# Altium PCB PCB1.PcbDoc
Units mil, origin at the board's own origin, x right, y up, seen from the top; angles counter-clockwise.
Board outline 2645 x 1530 mil, 4 copper layers (Top Layer, Ground, Power, Bottom Layer), stack 23.756 mil thick; 53 components, 33 nets, 159 pads, 54 vias.
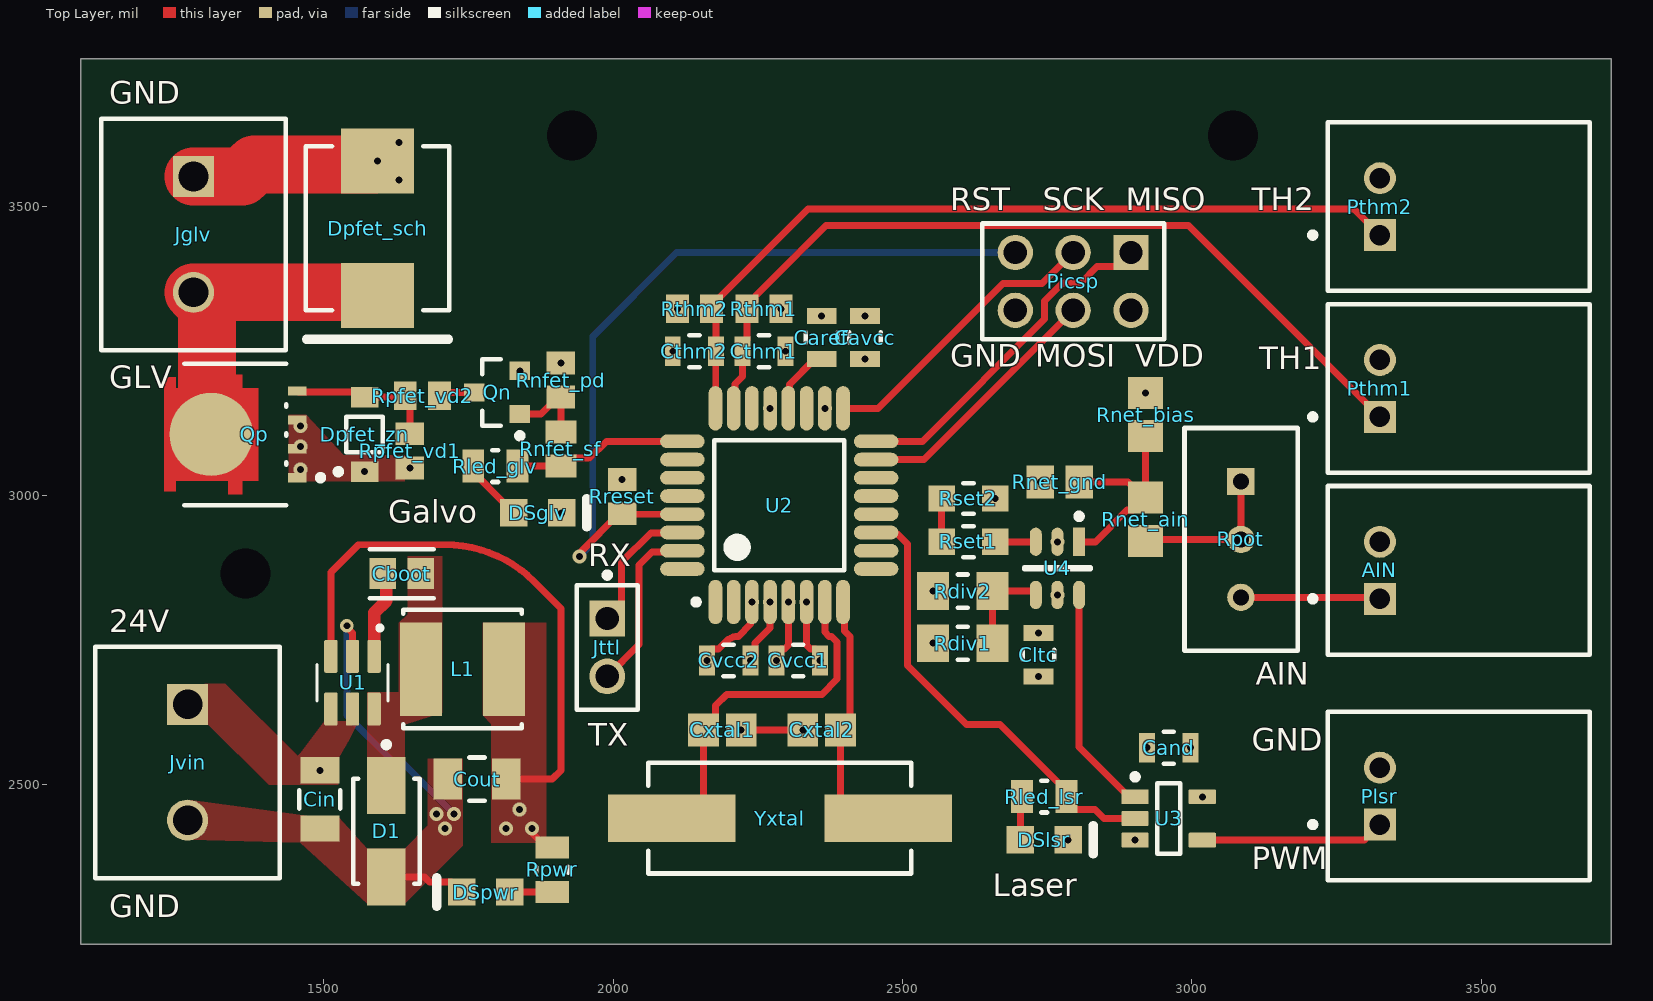
[diagram p0: Top Layer view]
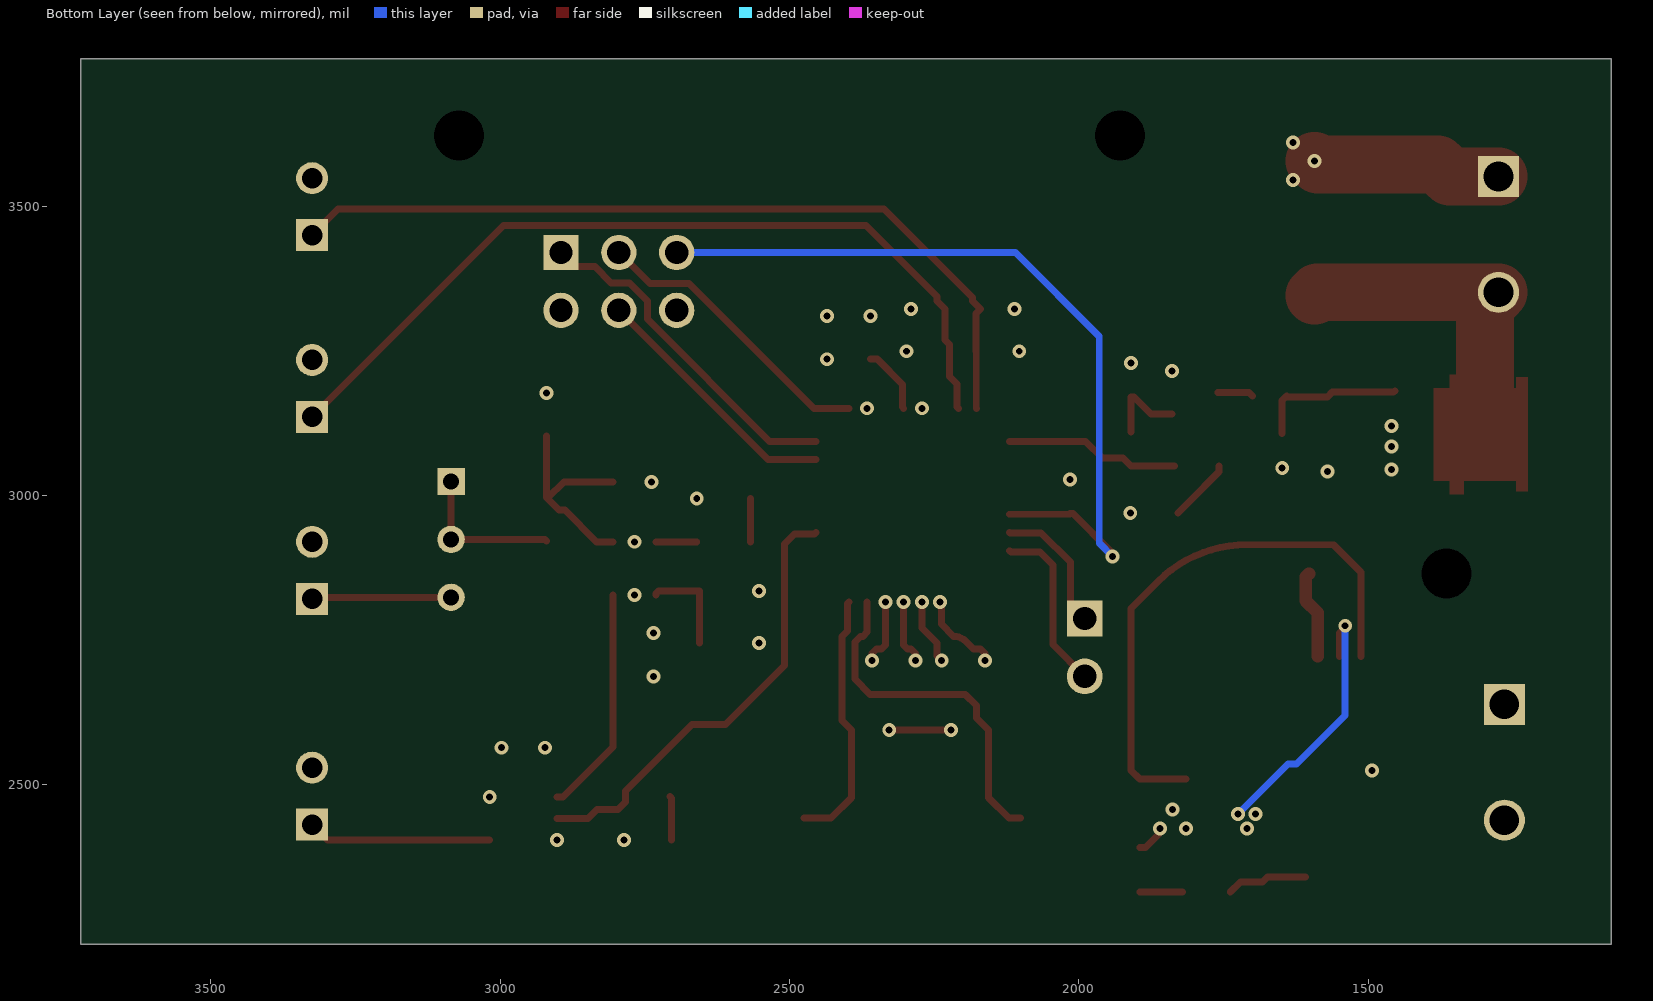
[diagram p1: Bottom Layer view, seen from below]
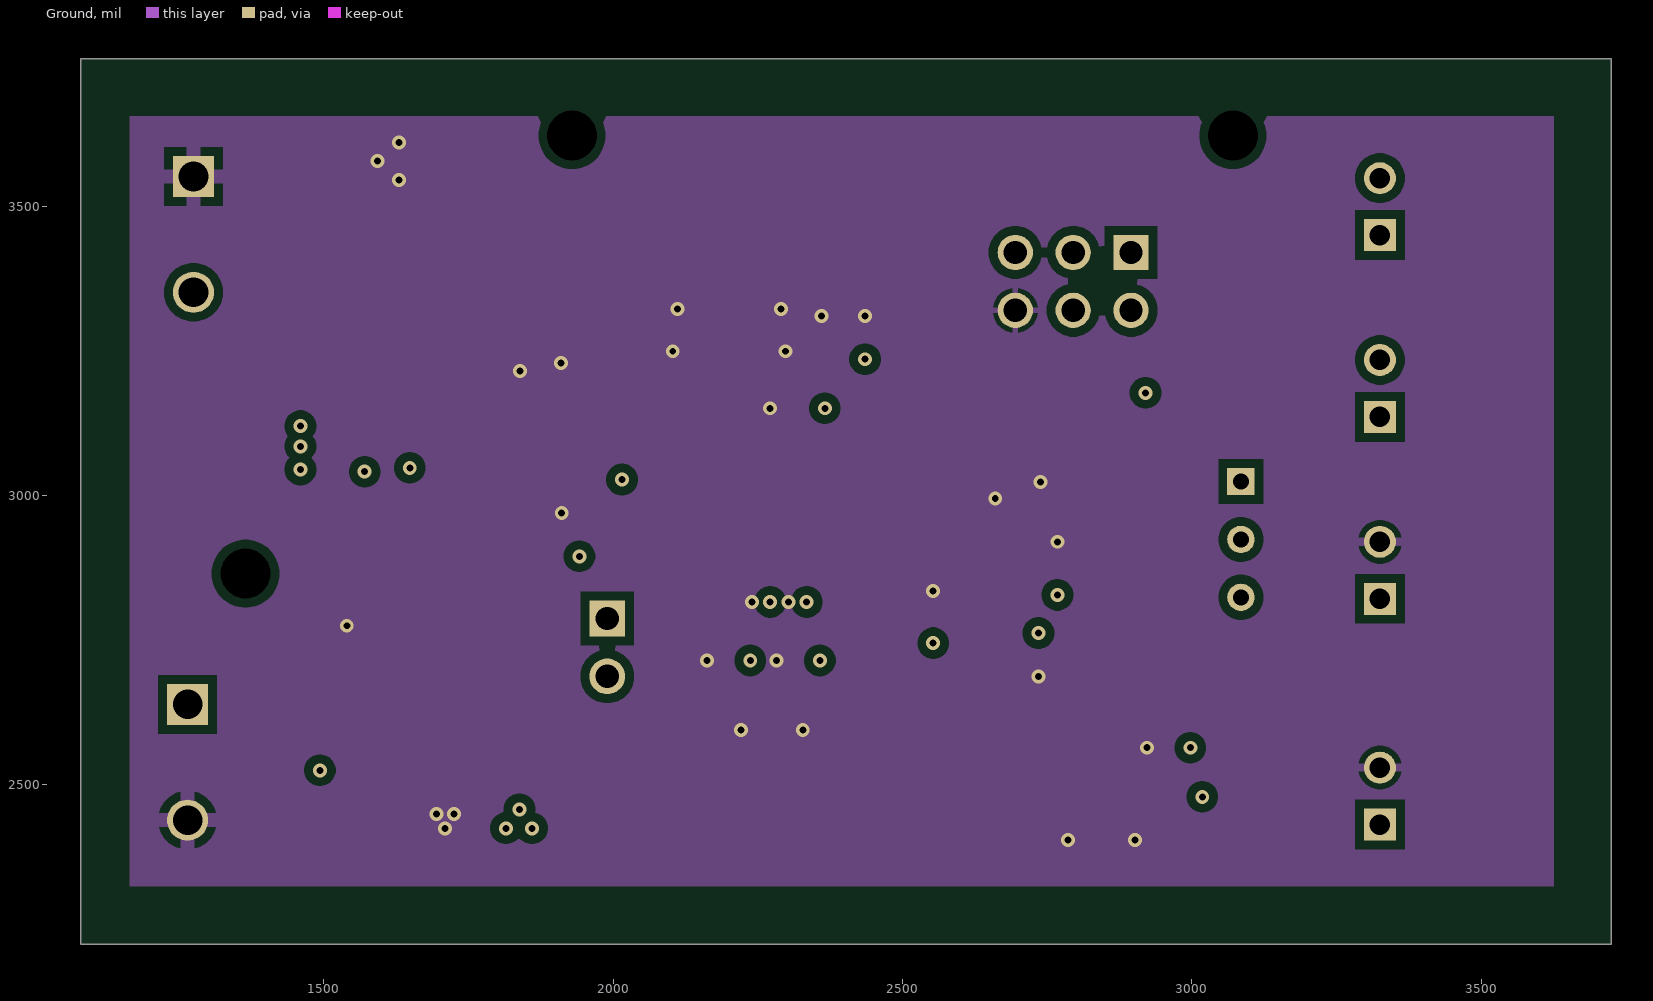
[diagram p2: Ground]
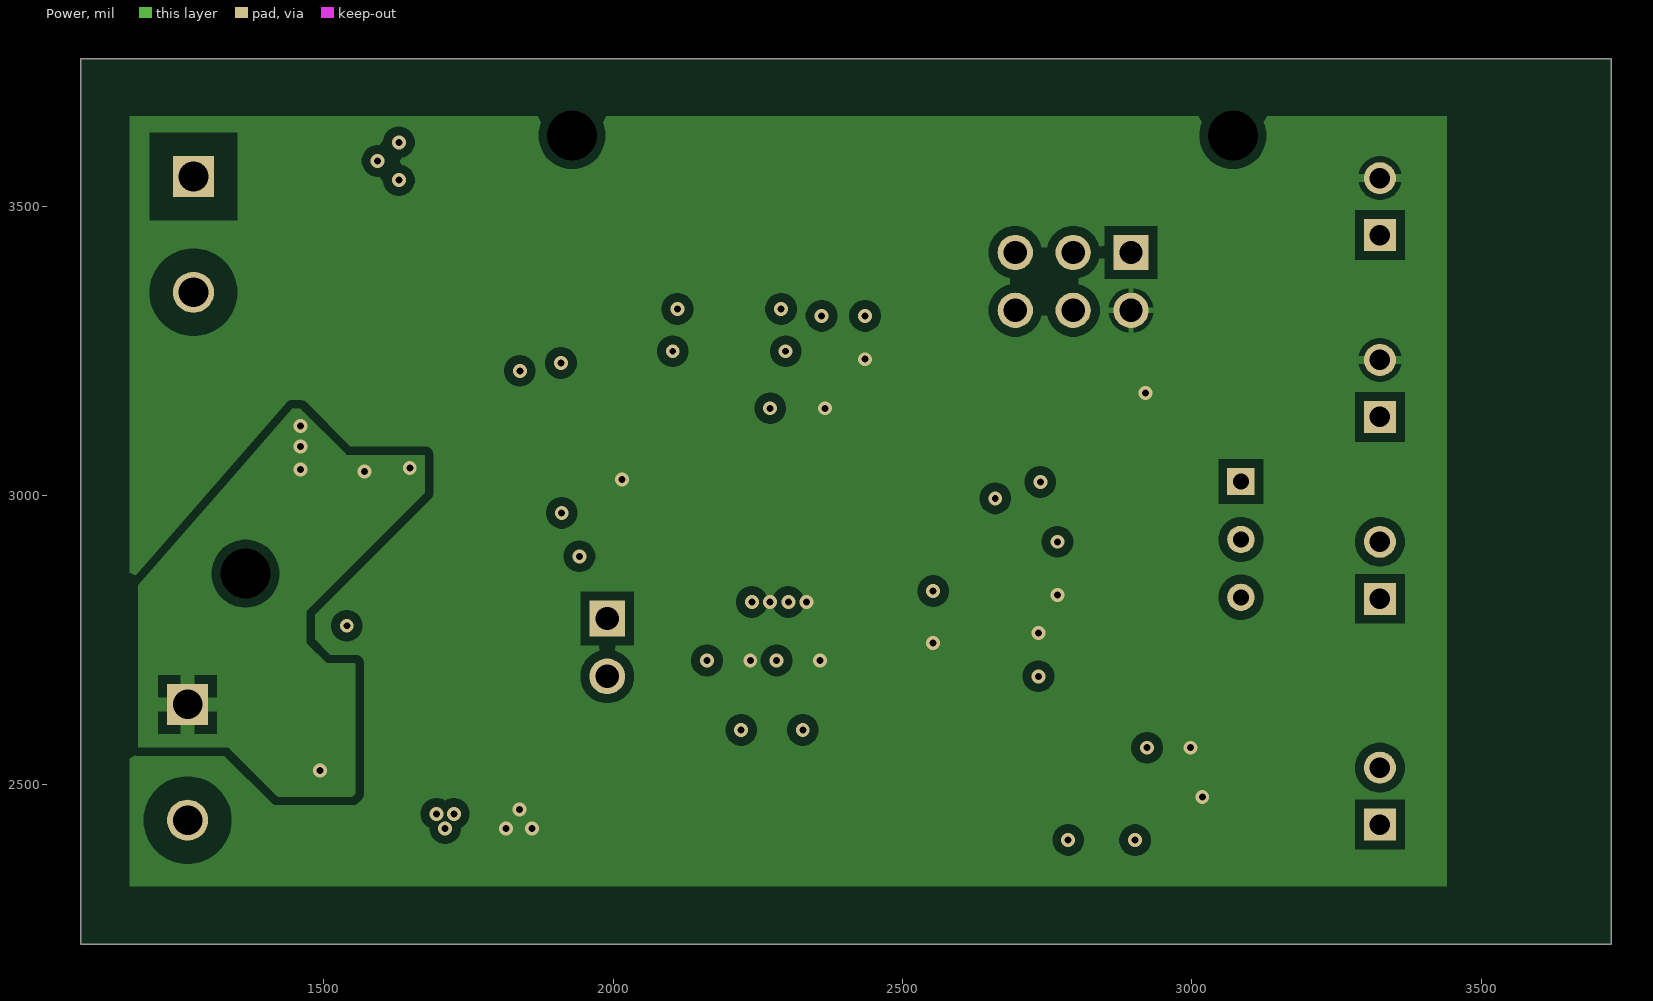
[diagram p3: Power]
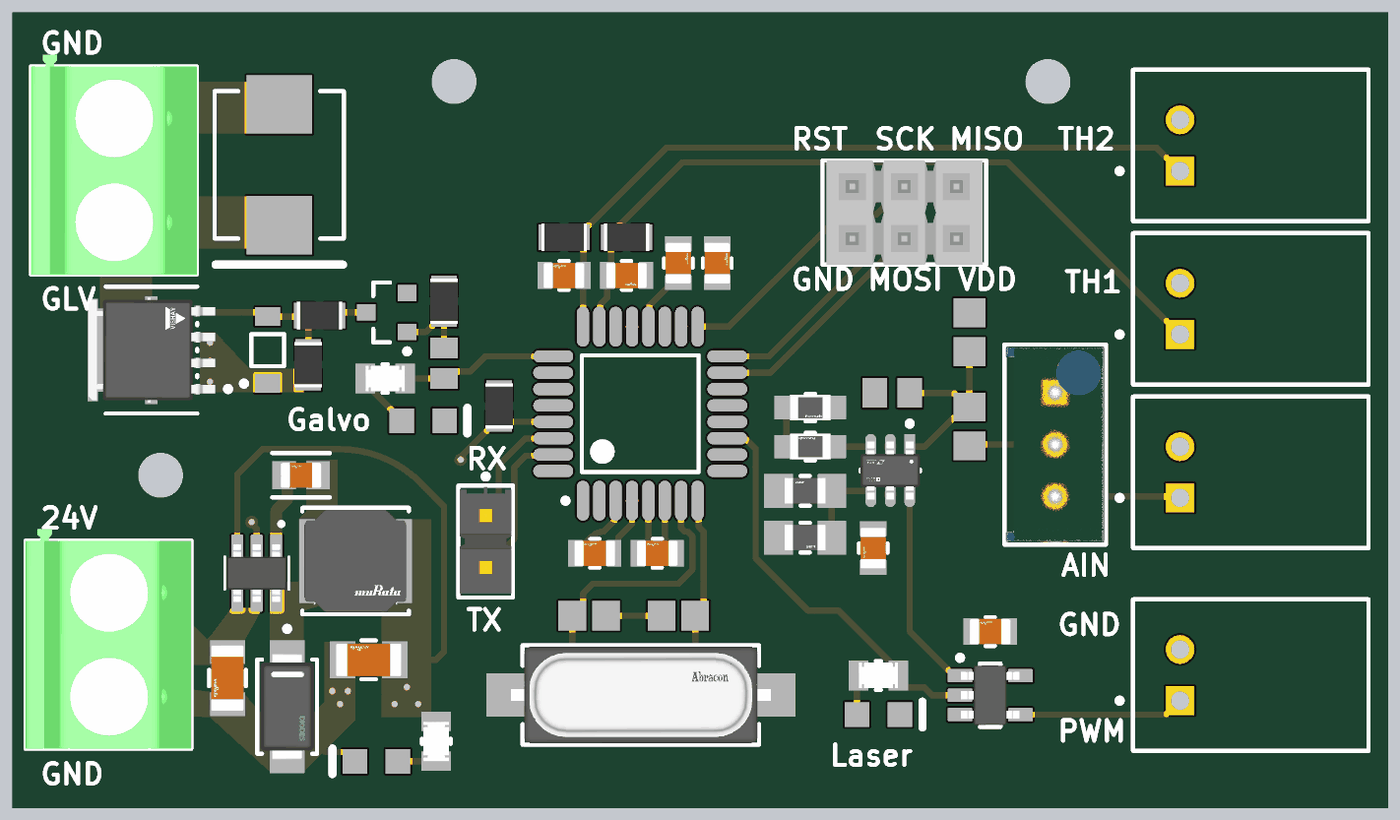
[diagram p4: 3D render of the assembled board from above, using the file's embedded part models]

## Layer stack, top to bottom
Top Solder: solder mask 0.4, Solder Resist, Dk 3.5
Top Layer: signal copper 1.4
Dielectric 2: prepreg 2.8, PP-006, Dk 4.1
Ground: signal copper 1.378
Dielectric 1: dielectric 12.6, FR-4, Dk 4.8
Power: signal copper 1.378
Dielectric 3: prepreg 2.8, PP-006, Dk 4.1
Bottom Layer: signal copper 1.4
Bottom Solder: solder mask 0.4, Solder Resist, Dk 3.5

## Board outline
1080,2225 1080,3755 3725,3755 3725,2225

## Design rules (kind name [scope] priority, off if disabled: settings)
BoardOutlineClearance [All] p1: gap=15 ignorepadtopadclearanceinfootprint=FALSE
Clearance LMRRoom_LessClearance [WithinRoom('LMR_Room')] p1: gap=10 ignorepadtopadclearanceinfootprint=FALSE
Clearance Galvo_MoreClearance [InComponent('Jglv') OR InComponent('Jvin') vs OnLayer('Power')] p2: gap=40 ignorepadtopadclearanceinfootprint=FALSE
Clearance Clearance_Power [OnLayer('Power') OR OnLayer('Ground')] p3: gap=15 ignorepadtopadclearanceinfootprint=FALSE
Clearance [All] p4: gap=4 ignorepadtopadclearanceinfootprint=FALSE except(5: Arc-Via Track-Via SMDPad-Via THPad-Via Via-Via Via-Fill Via-Poly Via-Region Via-Text; 10: Arc-Hole Track-Hole SMDPad-Hole THPad-Hole Via-Hole Fill-Hole Poly-Hole Region-Hole Text-Hole)
HoleSize [All] p1: absolutevalues=TRUE maxlimit=240 minlimit=7.9 maxpercent=80.000 minpercent=20.000
PolygonConnect Terminalblock_LessRelief [HasFootprint('PHOE-1729128-2_V')] p1: connectstyle=Relief reliefconductorwidth=25 reliefentries=4 polygonreliefangle="90 Angle" airgapwidth=15
PolygonConnect 24V_GND_NoReliefTOP [InComponent('Jvin') AND WithinRoom('24V_GND_Room')] p2: connectstyle=Direct reliefconductorwidth=10 reliefentries=4 polygonreliefangle="90 Angle" airgapwidth=10
PolygonConnect LMR_Room_Direct [WithinRoom('LMR_GND_Room') AND OnLayer('Top Layer') AND InNet('GND')] p3: connectstyle=Direct reliefconductorwidth=10 reliefentries=4 polygonreliefangle="90 Angle" airgapwidth=10
PolygonConnect ICSP_Relief [InComponent('Picsp')] p4: connectstyle=Relief reliefconductorwidth=10 reliefentries=4 polygonreliefangle="90 Angle" airgapwidth=8
PolygonConnect XH_Relief [HasFootprint('JST-S2B-XH-A(LF)(SN)_V')] p5: connectstyle=Relief reliefconductorwidth=15 reliefentries=2 polygonreliefangle="0 Angle" airgapwidth=10
PolygonConnect Via_NoReliefPowerGND [IsVia AND (InNet('VIN') OR InNet('GND') OR InNet('VDD'))] p6: connectstyle=Direct reliefconductorwidth=10 reliefentries=4 polygonreliefangle="90 Angle" airgapwidth=10
PolygonConnect PMOS_NoRelief [InComponent('Qp')] p7: connectstyle=Direct reliefconductorwidth=10 reliefentries=4 polygonreliefangle="90 Angle" airgapwidth=10
PolygonConnect Galvo_NoReliefTOP [InNet('NetDpfet_sch_1') AND OnLayer('Top Layer')] p8: connectstyle=Direct reliefconductorwidth=10 reliefentries=4 polygonreliefangle="90 Angle" airgapwidth=10
PolygonConnect VDD_NoReliefTOP [InNet('VDD') AND OnLayer('Top Layer')] p9: connectstyle=Direct reliefconductorwidth=10 reliefentries=4 polygonreliefangle="90 Angle" airgapwidth=10
PolygonConnect VIN_NoReliefTOP [InNet('VIN') AND OnLayer('Top Layer')] p10: connectstyle=Direct reliefconductorwidth=10 reliefentries=4 polygonreliefangle="90 Angle" airgapwidth=10
PolygonConnect SW_NoReliefTOP [InNet('SW') AND OnLayer('Top Layer')] p11: connectstyle=Direct reliefconductorwidth=10 reliefentries=4 polygonreliefangle="90 Angle" airgapwidth=10
PolygonConnect [All] p12: connectstyle=Relief reliefconductorwidth=15 reliefentries=4 polygonreliefangle="90 Angle" airgapwidth=10
RoomDefinition 24V_GND_Room [False vs False] p1: confinementstyle=ConfineIn formatcopy=TRUE lockcomponents=FALSE outline 1190,2510 1355,2510 1355,2355 1190,2355
RoomDefinition LMR_GND_Room [False vs False] p2: confinementstyle=ConfineIn formatcopy=TRUE lockcomponents=FALSE outline 1435,2575 1745,2575 1745,2280 1435,2280
RoutingVias [All] p1: holewidth=240 width=250 viastyle="Through Hole" minholewidth=8 minwidth=18 maxholewidth=28 maxwidth=50
SilkToSilkClearance [All] p1: silktosilkclearance=0
SolderMaskExpansion [All] p1: expansion=4 istentingtop=FALSE
SupplyNets "Schematic Supply Nets" [InNet('GND')] p1: voltage=0.000
Width [All] p1: maxlimit=200 minlimit=4 preferedwidth=12 midlayer1_minwidth=10 midlayer1_maxwidth=10 midlayer1_prefwidth=10 midlayer2_minwidth=10 midlayer2_maxwidth=10 midlayer2_prefwidth=10 minimp=50.000000 maximp=50.000000 favimp=50.000000
28 further rules are at their usual default settings.

## Components (designator, comment, footprint, x,y, rotation, side; value= is the part's Value field where it differs from the comment)
AIN "Analog IN" JST-S2B-XH-A(LF)(SN)_V 3325,2870.79 r90 top
Cand "GCM21BR72A104KA37L" FP-GCM21B-0_15-MFG 2960,2564.29 r180 top
Caref "GCM21BR72A104KA37L" FP-GCM21B-0_15-MFG 2360.34,3272.92 r90 top
Cavcc "GCM21BR72A104KA37L" FP-GCM21B-0_15-MFG 2435.34,3272.92 r90 top
Cboot "GRM21BR71H474KA88L" FP-GRM21B-0_1-IPC_B 1635,2865 r180 top
Cin "GRM31CR71H475KA12L" FP-GRM31C-0_2-e0_3_0_8-IPC_C 1493.56,2475 r270 top
Cltc "0.1μF" FP-GCM21B-0_15-MFG 2735,2725 r270 top
Cout "GRM31CZ71C226ME15L" FP-GRM31C-0_3-e0_3_0_8-IPC_C 1765,2510 r180 top
Cthm1 "GCM21BR72A104KA37L" FP-GCM21B-0_15-MFG 2260.81,3249.3 r0 top
Cthm2 "GCM21BR72A104KA37L" FP-GCM21B-0_15-MFG 2140.56,3249.3 r180 top
Cvcc1 "GCM21BR72A104KA37L" FP-GCM21B-0_15-MFG 2320,2715 r180 top
Cvcc2 "GCM21BR72A104KA37L" FP-GCM21B-0_15-MFG 2199.75,2715 r180 top
Cxtal1 "08055A270FAT2A" CAPC2013X94X50NL20T25 2188.93,2595 r180 top
Cxtal2 "08055A270FAT2A" CAPC2013X94X50NL20T25 2360.34,2595 r0 top
D1 "B160-13-F" FP-SMA-MFG 1608.3,2420 r270 top
Dpfet_sch "B560C-13-F" DIOD-B5X0C-2_M 1593.14,3461.9 r90 top
Dpfet_zn "MMSZ5245BT1G" ONSC-SOD-123-2-425-04_V 1570.93,3105.63 r90 top
DSglv "HSMG-C170" AVAG-HSMX-C170_V 1870,2970 r0 top
DSlsr "HSMG-C170" AVAG-HSMX-C170_V 2745,2405 r0 top
DSpwr "HSMG-C170" AVAG-HSMX-C170_V 1780,2315 r180 top
Jglv "1729128" PHOE-1729128-2_V 1275.07,3451.13 r270 top
Jttl "TSW-102-07-F-S" FP-TSW-102-07-F-S-MFG 1990,2737.6 r270 top
Jvin "1729128" PHOE-1729128-2_V 1264.92,2539.09 r270 top
L1 "LQH5BPN100MT0L" FP-LQH5BPB_T0-MFG 1740,2700.13 r0 top
Picsp "MTSW-103-07-F-D-244" SMTC-MTSW-103-07-X-D-244 2895,3420 r180 top
Plsr "S2B-XH-A(LF)(SN)" JST-S2B-XH-A(LF)(SN)_V 3325,2480.79 r90 top
Pthm1 "S2B-XH-A(LF)(SN)" JST-S2B-XH-A(LF)(SN)_V 3325,3185 r90 top
Pthm2 "S2B-XH-A(LF)(SN)" JST-S2B-XH-A(LF)(SN)_V 3325,3499.21 r90 top
Qn "2N7002LT1G" ONSC-SOT-23-3-318-08_V 1799.56,3178.04 r180 top
Qp "SQJ459EP-T1_GE3" FP-C15-1203-SINGLE-MFG 1347.39,3105.63 r90 top
Rdiv1 "1MΩ" FP-RG2012-MFG 2604.26,2745 r0 top
Rdiv2 "28kΩ" FP-RG2012-MFG 2604.26,2835 r180 top
Rled_glv "CRCW08051K20FKEA" FP-CRCW0805-e3-MFG 1796.61,3050.9 r180 top
Rled_lsr "CRCW08051K20FKEA" FP-CRCW0805-e3-MFG 2745,2479.97 r180 top
Rnet_ain "ERA-6AEB9311V" RESC2013X60X40ML20T25 2920,2958.98 r90 top
Rnet_bias "ERA6AEB4993V" RESC2013X60X40ML20T25 2920,3140 r90 top
Rnet_gnd "ERA6AEB113V" RESC2013X60X40NL20T25 2771.75,3023.39 r0 top
Rnfet_pd "ERA-6AEB103V" RESC2013X60X40LL20T25_A 1910,3199.53 r90 top
Rnfet_sf "ERA6AEB331V" RESC2013X60X40LL20T25 1910,3080.43 r90 top
Rpfet_vd1 "ERA-6AEB103V" RESC2013X60X40LL20T25_A 1648.86,3077.33 r270 top
Rpfet_vd2 "ERA-6AEB103V" RESC2013X60X40LL20T25_A 1670.51,3171.99 r0 top
Rpot "3296W-1-202LF" FP-3296W-MFG 3085,2924.13 r180 top
Rpwr "CRCW08051K20FKEA" FP-CRCW0805-e3-MFG 1895,2353.39 r270 top
Rreset "ERA-6AEB103V" RESC2013X60X40LL20T25_A 2015.52,2998.11 r90 top
Rset1 "150kΩ" FP-ERA6A-MFG 2614.1,2920 r180 top
Rset2 "47KΩ" FP-ERA6A-MFG 2614.1,2995 r0 top
Rthm1 "ERA-6AEB103V" RESC2013X60X40LL20T25_A 2260.81,3322.3 r0 top
Rthm2 "ERA-6AEB103V" RESC2013X60X40LL20T25_A 2140.81,3322.3 r180 top
U1 "LMR16006YQ5DDCRQ1" SOT95P280X110-6N 1549.87,2676.75 r270 top
U2 "ATmega328P-AU" 32A_M 2287.16,2983.39 r90 top
U3 "SN74LVC1G08DBVR" DBV0005A_M 2960,2442.07 r0 top
U4 "LTC6992MPS6-1#TRMPBF" FP-S6-6-05-08-1636-IPC_B 2767.81,2874.2 r270 top
Yxtal "ABLS-16.000MHZ-K4T" FP-ABLS-MFG 2288.16,2442.48 r0 top

## Footprints (in the part's own frame and the unit in brackets; to place one, negate y for a bottom-side part, rotate by r counter-clockwise, add the part's x,y. Pads: shape width x height; smd on the part's side, far side on the other; paste and mask are expansions set on the pad)
32A_M [mm] "Thin QFP, 32-Leads, Body 7x7mm, Pitch 0.8mm, IPC Low Density"
  oval 1.95x0.6 smd: 1(-4.25,2.8) 2(-4.25,2) 3(-4.25,1.2) 4(-4.25,0.4) 5(-4.25,-0.4) 6(-4.25,-1.2) 7(-4.25,-2) 8(-4.25,-2.8) 17(4.25,-2.8) 18(4.25,-2) 19(4.25,-1.2) 20(4.25,-0.4) 21(4.25,0.4) 22(4.25,1.2) 23(4.25,2) 24(4.25,2.8)
  oval 0.6x1.95 smd: 9(-2.8,-4.25) 10(-2,-4.25) 11(-1.2,-4.25) 12(-0.4,-4.25) 13(0.4,-4.25) 14(1.2,-4.25) 15(2,-4.25) 16(2.8,-4.25) 25(2.8,4.25) 26(2,4.25) 27(1.2,4.25) 28(0.4,4.25) 29(-0.4,4.25) 30(-1.2,4.25) 31(-2,4.25) 32(-2.8,4.25)
  silkscreen extent -4.37,-2.85 2.85,3.77, body extent -3.5,-3.5 3.5,3.5, height 1.2
AVAG-HSMX-C170_V [mm] "SMD, 2-Leads, Body 2x1.25mm, Height 0.8mm"
  rect 1.2x1.2 smd: 1(-1.05,0) 2(1.05,0)
  silkscreen extent 2.15,-0.63 2.15,0.63, body extent -1,-0.63 1,0.63, height 0.8
CAPC2013X94X50NL20T25 [mm] "Chip Capacitor, 2-Leads, Body 2.01x1.25mm, IPC Medium Density"
  rect 1.35x1.45 smd: 1(-0.825,0) 2(0.825,0)
  body extent -1.1,-0.72 1.11,0.72, height 0.94
DBV0005A_M [mm] "SOT23, 5-Leads, Body 3.05x1.75mm, Pitch 0.95mm, IPC Low Density"
  rrect15% 1.2x0.65 smd: 1(-1.475,0.95) 2(-1.475,0) 3(-1.475,-0.95) 4(1.475,-0.95) 5(1.475,0.95)
  silkscreen extent -1.6,-1.55 0.5,1.95, body extent -1.42,-1.46 1.42,1.46, height 1.08
DIOD-B5X0C-2_M [mm] "Molded Diode, 2-Leads, Body 7.11x6.22mm, IPC Low Density"
  rect 2.85x3.2 smd: 1(-2.95,0) 2(2.95,0)
  silkscreen extent -4.87,-3.15 3.6,3.15, body extent -3.56,-3.11 3.55,3.11, height 2.63
FP-3296W-MFG [mm]
  rect 1.2x1.2 hole 0.7 paste-2539.97 mask+0: 1(0.005,-2.54)
  round 1.2 hole 0.7 paste-2539.97 mask+0: 2(0.005,0) 3(0.005,2.54)
  silkscreen extent -2.48,-4.89 2.48,4.89, body extent -2.58,-4.99 2.58,4.99, height 0.25
FP-ABLS-MFG [mm]
  rect 5.6x2.1 smd paste+0 mask+0: 1(-4.75,0) 2(4.75,0)
  silkscreen extent -5.77,-2.42 5.77,2.42, body extent -7.65,-2.52 7.65,2.52, height 0.25
FP-C15-1203-SINGLE-MFG [mm]
  rect 0.41x0.82 smd paste+0 mask+0: 1(-1.905,-2.715) 2(-0.635,-2.715) 3(0.635,-2.715) 4(1.905,-2.715)
  round 3.655 smd paste+0 mask+0: 5(0,1.061)
  Top Layer region: 0,-1.015 -2.03,-1.015 -2.03,-0.305 -2.625,-0.305 -2.625,0.305 -2.03,0.305 -2.03,2.615 -2.5,2.615 -2.5,3.125 2.5,3.125 2.5,2.615 2.03,2.615 2.03,0.305 2.625,0.305 2.625,-0.305 2.03,-0.305 2.03,-1.015
  silkscreen extent -3.1,-3.87 3.1,2.23, body extent -2.73,-3.22 2.73,3.23, height 0.25
FP-CRCW0805-e3-MFG [mm]
  rect 0.95x1.45 smd paste+0 mask+0: 1(-0.975,0) 2(0.975,0)
  silkscreen extent -0.13,-0.7 0.13,0.7, body extent -1.55,-0.82 1.55,0.82, height 0.25
FP-ERA6A-MFG [mm]
  rect 1.15x1.15 smd paste+0 mask+0: 1(-1.175,0) 2(1.175,0)
  silkscreen extent -0.23,-0.67 0.23,0.67, body extent -1.85,-0.77 1.85,0.77, height 0.25
FP-GCM21B-0_15-MFG [mm]
  rect 0.7x1.3 smd paste+0 mask+0: 1(-0.95,0) 2(0.95,0)
  silkscreen extent -0.23,-0.7 0.23,0.7, body extent -1.4,-0.8 1.4,0.8, height 0.25
FP-GRM21B-0_1-IPC_B [mil]
  rect 45.58x53.63 smd paste+0 mask+0: 1(-32.57,0) 2(32.57,0)
  silkscreen extent -55,-43 55,43, body extent -65,-37 65,37, height 10
FP-GRM31C-0_2-e0_3_0_8-IPC_C [mil]
  rect 45.46x67.17 smd paste+0 mask+0: 1(-50.23,0) 2(50.23,0)
  silkscreen extent -16,-35 16,35, body extent -77,-39 77,39, height 10
FP-GRM31C-0_3-e0_3_0_8-IPC_C [mil]
  rect 49.35x71.03 smd paste+0 mask+0: 1(-50.21,0) 2(50.21,0)
  silkscreen extent -14,-37 14,37, body extent -79,-41 79,41, height 10
FP-LQH5BPB_T0-MFG [mm]
  rect 1.85x4.1 smd paste+0 mask+0: 1(-1.825,0) 2(1.825,0)
  silkscreen extent -2.6,-2.6 2.6,2.6, body extent -2.85,-2.7 2.85,2.7, height 0.25
FP-RG2012-MFG [mm]
  rect 1.4x1.65 smd paste+0 mask+0: 1(-1.3,0) 2(1.3,0)
  silkscreen extent -0.22,-0.72 0.22,0.72, body extent -2.1,-0.92 2.1,0.92, height 0.25
FP-S6-6-05-08-1636-IPC_B [mm]
  rect 1.24x0.526 smd paste+0 mask+0: 1(-1.165,0.95)
  rrect100% 1.24x0.526 smd paste+0 mask+0: 2(-1.165,0) 3(-1.165,-0.95) 4(1.166,-0.95) 5(1.166,0) 6(1.166,0.95)
  silkscreen extent -2.41,-1.45 0.05,1.45, body extent -2.04,-1.7 2.04,1.7, height 0.25
FP-SMA-MFG [mm]
  rect 2.5x1.7 smd paste+0 mask+0: 1(-2,0) 2(2,0)
  silkscreen extent -3.92,-1.46 2.3,1.46, body extent -3.35,-1.56 3.35,1.56, height 0.25
FP-TSW-102-07-F-S-MFG [mm]
  rect 1.57x1.57 hole 1.02 paste-2539.97 mask+0: 1(-1.27,0)
  round 1.57 hole 1.02 paste-2539.97 mask+0: 2(1.27,0)
  silkscreen extent -3.3,-1.34 2.73,1.34, body extent -2.83,-1.44 2.83,1.44, height 0.25
JST-S2B-XH-A(LF)(SN)_V [mm] "Header, 2-Leads, Body 7.4x11.5mm, Pitch 2.5mm"
  rect 1.4x1.4 hole 0.9: 1(-1.25,0)
  round 1.4 hole 0.9: 2(1.25,0)
  silkscreen extent -3.7,-9.2 3.7,3.07, body extent -3.7,-9.2 3.7,2.3, height 6.1
ONSC-SOD-123-2-425-04_V [mm] "SOD, 2-Leads, Body 2.69x1.6mm"
  rect 0.91x1.22 smd: 1(-1.635,0) 2(1.635,0)
  silkscreen extent -1.76,-0.8 0.78,1.28, body extent -1.35,-0.8 1.35,0.8, height 1.35
ONSC-SOT-23-3-318-08_V [mm] "SOT23, 3-Leads, Body 2.92x1.3mm, Pitch 0.95mm"
  rect 0.9x0.8 smd: 1(-1,0.95) 2(-1,-0.95) 3(1,0)
  silkscreen extent -1.13,-1.46 0.65,2.02, body extent -0.65,-1.46 0.65,1.46, height 1.11
PHOE-1729128-2_V [mm] "Receptacle, 2-Leads, Body 8.1x10.16mm, Pitch 5.08mm"
  rect 1.8x1.8 hole 1.3: 1(-2.54,0)
  round 1.8 hole 1.3: 2(2.54,0)
  silkscreen extent -5.08,-4.05 5.08,4.05, body extent -5.65,-4.05 5.08,4.05, height 10.01
RESC2013X60X40LL20T25 [mm] "Chip Resistor, 2-Leads, Body 2.00x1.25mm, IPC High Density"
  rect 1x1.35 smd: 1(-0.75,0) 2(0.75,0)
  body extent -1.1,-0.72 1.1,0.72, height 0.6
RESC2013X60X40LL20T25_A [mm] "Chip Resistor, 2-Leads, Body 2.20x1.35mm, IPC High Density"
  rect 1x1.25 smd: 1(-0.75,0) 2(0.75,0)
  body extent -1.1,-0.67 1.1,0.67, height 0.6
RESC2013X60X40ML20T25 [mm] "Chip Resistor, 2-Leads, Body 2.00x1.25mm, IPC Low Density"
  rect 1.4x1.55 smd: 1(-0.95,0) 2(0.95,0)
  body extent -1.1,-0.72 1.1,0.72, height 0.6
RESC2013X60X40NL20T25 [mm] "Chip Resistor, 2-Leads, Body 2.00x1.25mm, IPC Medium Density"
  rect 1.2x1.45 smd: 1(-0.85,0) 2(0.85,0)
  body extent -1.1,-0.72 1.1,0.72, height 0.6
SMTC-MTSW-103-07-X-D-244 [mm] "Assembly .025\" [.64] SQ Post Terminal Strip, 2x3 Pins, Vertical, 2.54mm Pitch, Male"
  rect 1.55x1.55 hole 1.02: 1(0,0)
  round 1.55 hole 1.02: 2(0,2.54) 3(2.54,0) 4(2.54,2.54) 5(5.08,0) 6(5.08,2.54)
  silkscreen extent -1.46,-1.27 6.54,3.81, body extent -1.27,-1.27 6.35,3.81, height 8.74
SOT95P280X110-6N [mm]
  rrect25% 1.45x0.59 smd: 1(-1.155,0.95) 2(-1.155,0) 3(-1.155,-0.95) 4(1.155,-0.95) 5(1.155,0) 6(1.155,0.95)
  silkscreen extent -2.5,-1.57 0.8,1.57, body extent -1.4,-1.45 1.4,1.45, height 1.1

## Part data
AIN Plsr Pthm1 Pthm2: library part CMP-1755-00005-1, "Male Header, Pitch 2.5 mm, 1 x 2 Position, Height 6.1 mm, Tail Length 3.4 mm, -25 to 85 degC, RoHS, Bulk", Capacitance="1 nF", Case\Package=Radial, Max Operating Temperature="125 degC", Min Operating Temperature="-55 degC", Package Quantity=500, Tolerance=10%, Type (Capacitors)=X7R, Voltage Rating="100 V", ComponentLink1Description="Manufacturer URL", ComponentLink1URL=http://www.jst.com/home2.html, ComponentLink2Description=Datasheet, ComponentLink2URL=http://www.jst-mfg.com/product/pdf/eng/eXH.pdf, DatasheetVersion=May-16, Height="2.54 mm", Lead Pitch="2.54 mm", Length="5.33 mm", Mount="Through Hole", PackageDescription="Male Header, Pitch 2.5 mm, 1 x 2 Position, Height 6.1 mm, Tail Length 3.4 mm", PackageReference=S2B-XH-A(LF)(SN), Packaging=Bulk, Pins=2, Radiation Hardening=No, REACH SVHC="No SVHC", RoHSCompliant=true, Voltage Rating (DC)="100 V", Width="3.81 mm"
Cand Caref Cavcc Cltc Cthm1 Cthm2 Cvcc1 Cvcc2: library part CMP-2007-03364-2, "Ceramic Capacitor for Automotive 100nF ±10% 100VDC X7R 0805 Embossed T/R", Capacitance=100nF, Case Code (Imperial)=0805, Case Code (Metric)=2012, Dielectric=X7R, Max Operating Temperature=125°C, Min Operating Temperature=-55°C, Package Quantity=1, Ratings=AEC-Q200, Tolerance=10%, Voltage=100V, Case/Package=0805, Depth=1.25mm, Height=1.25mm, Lead Free="Lead Free", Length=2mm, Mount="Surface Mount", Packaging="Tape and Reel", Radiation Hardening=No, REACH SVHC="No SVHC", Termination=SMD/SMT, Thickness=0.055inch, Voltage Rating=100V, Voltage Rating (DC)=100V, Width=0.049inch
Cboot: library part CMP-06035-060025-1, "Chip Multilayer Ceramic Capacitors for General Purpose, 0805, 0.47uF, X7R, 15%, 10%, 50V", Capacitance=470nF, Case Code (Imperial)=0805, Case Code (Metric)=2012, Dielectric=X7R, Max Operating Temperature=125°C, Min Operating Temperature=-55°C, Package Quantity=1, Tolerance=10%, Voltage=50V, Case/Package=0805, Construction=Flat, Depth=1.25mm, Height=1.25mm, Lead Free="Lead Free", Length=2mm, Material=Ceramic, Mount="Surface Mount", Packaging="Tape and Reel", REACH SVHC="No SVHC", Series=GRM, Size=1.25mm, Termination=SMD/SMT, Thickness=0.053inch, Voltage Rating=50V, Voltage Rating (DC)=50V, Width=0.049inch
Cin: library part CMP-1037-04923-3, "Chip Multilayer Ceramic Capacitors for General Purpose, 1206, 4.7uF, X7R, 15%, 10%, 50V", Capacitance=4.7uF, Case Code (Imperial)=1206, Case Code (Metric)=3216, Dielectric=X7R, Max Operating Temperature=125°C, Min Operating Temperature=-55°C, Package Quantity=2000, Tolerance=10%, Voltage=50V, Case/Package=1206, Depth=1.6mm, Height=1.6mm, Lead Free="Lead Free", Length=3.2mm, Material=Ceramic, Mount="Surface Mount", Packaging="Tape and Reel", Radiation Hardening=No, REACH SVHC="No SVHC", Termination=SMD/SMT, Thickness=0.071inch, Voltage Rating=50V, Voltage Rating (DC)=50V, Width=0.063inch
Cout: library part CMP-06035-055218-1, "Chip Multilayer Ceramic Capacitors for General Purpose, 1206, 22uF, X7R, 15%, 20%, 16V"
Cxtal1 Cxtal2: library part CMP-2007-04304-1, Manufacturer="AVX Interconnect / Elco", Part Number=08055A270FAT2A
D1: library part CMP-2000-05885-2, "DIODE SCHOTTKY 60V 1A SMA", Average Rectified Current=1A, Capacitance=110pF, Case/Package=SMA, Forward Voltage=700mV, Max Forward Surge Current (Ifsm)=30A, Max Operating Temperature=150°C, Max Repetitive Reverse Voltage (Vrrm)=60V, Min Operating Temperature=-65°C, Package Quantity=5000, Peak Reverse Current=500uA, Contact Plating=Tin, Current Rating=1A, Element Configuration=Single, Forward Current=1A, Height=2.1mm, Lead Free="Lead Free", Length=4.6mm, Max Reverse Voltage (DC)=60V, Mount="Surface Mount", Number of Pins=2, Output Current=1A, Packaging="Tape and Reel", Peak Non-Repetitive Surge Current=30A, Polarity=Standard, Radiation Hardening=No, REACH SVHC="No SVHC", Termination=SMD/SMT, Voltage Rating (DC)=60V, Weight=0.002258oz, Width=2.92mm
Dpfet_sch: library part CMP-2000-05098-2, "Schottky Barrier Rectifier, 5 A, 60 V, -55 to 125 degC, 2-Pin SMD, RoHS, Tape and Reel", If - Forward Current=5A, Ifsm - Forward Surge Current=100A, Ir - Reverse Current=500uA, Manufacturer=DiodesIncorporated, Maximum Operating Temperature=+125C, Minimum Operating Temperature=-55C, Operating Temperature Range=-55Cto+125C, Package / Case=SMC, Vf - Forward Voltage=0.7V, Vrrm - Repetitive Reverse Voltage=60V, Brand=DiodesIncorporated, Configuration=Single, Datasheet URL=https://datasheet.ciiva.com/27052/1538961-27052355.pdf, Datasheet Version="Rev. 7-2, 06/2007", Factory Pack Quantity=3000, Height=2.5mm, Length=7.11mm, Manufacturer URL=http://www.diodes.com/, Mounting Style=SMD/SMT, Packaging=Reel, Product=SchottkyDiodes, Product Category=SchottkyDiodes&Rectifiers, RoHS=True, Series=B560, Technology=Si, Termination Style=SMD/SMT, Type=SchottkyBarrierRectifier, Unit Weight=0.007408oz, Width=6.22mm
Dpfet_zn: library part CMP-1060-00535-1, "Zener Voltage Regulator, 500 mW, 2-Pin SOD-123, Pb-Free, Tape and Reel", Manufacturer="On Semiconductor", ComponentLink1Description="Manufacturer URL", ComponentLink1URL=http://www.onsemi.com/, ComponentLink2Description=Datasheet, ComponentLink2URL=http://www.onsemi.com/pub_link/Collateral/MMSZ5221BT1-D.PDF, ComponentLink3Description="Package Specification", ComponentLink3URL=http://www.onsemi.com/pub_link/Collateral/425-04.PDF, DatasheetVersion="Rev. 12", Mounting Technology="Surface Mount", P Max (W)=0.5, PackageDescription="2-Pin SOD, Body 1.6 x 2.69 mm", PackageReference=SOD-123-2-425-04, PackageVersion="Rev. G, 10/2009", Packing="Tape and Reel", PartNumber=MMSZ5245BT1G, RoHS=Pb-Free, VZ Typ (V)=15
DSglv DSlsr DSpwr: library part CMP-2000-05062-1, "Chip LED, Green, 2.2 V, -40 to 85 degC, 2-Pin SMD, Pb-Free, Tape and Reel", Forward Current If=20mA, Forward Voltage=2.2V, Forward Voltage VF Max=2.6V, LED Colour=Green, Manufacturer=Avago, Operating Temperature Max=85degC, Operating Temperature Min=-30degC, Operating Temperature Range=-30degCto+85degC, Opto Case Style=SMD, Package Description="2-Pin Surface Mount Device, Body 2 x 1.25 mm, Height 0.8 mm", Package Reference=HSMX-C170, Storage Temperature Min=-40degC, Bulb Size=1.25mmx1.4mm, Datasheet URL=https://datasheet.ciiva.com/29280/180495-da-01-en-chip-led-hsmg-c170-gelb-gruen-29280971.pdf, Datasheet Version=Oct-08, Dominant Wavelength=572nm, Dominant Wavelength Typ=572nm, External Depth=0.8mm, External Length / Height=2mm, External Width=1.25mm, Forward Current If Max=20mA, LED Mounting=SMD, LED Type=Standard, Lens Shape=Rectangular, Light Area Height=1mm, Luminous Intensity=15mcd, Luminous Intensity Min=4mcd, Luminous Intensity Typ=15mcd, Manufacturer URL=http://www.avagotech.com/, Mounting Type=SMD, MSL=MSL2A-4weeks, No. of Pins=2, Opto Mounting Orientation=Top, Packaging=CutTape, Peak Forward Current=20mA, Peak Wavelength=570nm, PIV Max=5V, Storage Temperature Max=85degC, SVHC=NoSVHC(16-Jun-2014), Viewing Angle=170deg, Voltage Vf Typ=2.2V, Wavelength Typ=570nm
Jglv Jvin: library part CMP-2000-05815-1, "PCB Terminal Block, 13.5 A, 400 V, 2-Pin THD, RoHS, Bulk", Current Rating=13500mA, Manufacturer="Phoenix Contact", Package Description="2-Pin Through Hole Device, Body 8.1 x 10.16 mm, Pitch 5.08 mm", Package Reference=1729128-2, Package Version=03/2015, Voltage Rating=400V, Datasheet URL=https://datasheet.ciiva.com/16046/1729128-16046181.pdf, Datasheet Version=12/2013, Manufacturer URL=http://www.phoenixcontact.com/, Mounting Technology=ThroughHole, No. of Positions=2, No. of Rows=1, Orientation=Horizontal, Package URL=https://www.phoenixcontact.com/online/portal/pi/pxc/product_detail_page/!ut/p/b1/3VdJjqNKFDxLH8AFycySyWY2ozFsEPOMMQaDOX1XedGL_1Vdm5YXJleknhSKeBkvI6EA8ncAo3AYoDhBQGco6KN7VURTdemj9us_IEKEZo_YHiPAEWEFmDGOHMORkqKYCORBZxgL7ZoaZYcbFFUZ3fqxSY6GOuxydWUuHqz1ynmMFygu583Bob0Ewr6Sd_l-5m-kAueHiB0jpRwZwe58wwtkpxtMYd_LmGcDRU02dRNEyWt6Y2ti5pSyJ_reIkzIulrqApdnbT11V5jnCKbYNCvhEM1MCpPByat_X379-iThf08CI5GfOPqfBeS3BRoBOdD55AKVv0iLwCMq-2BrzXWSGRH7pUGD9uwXQjiph3xL0DKQwdGa0JImiIOmBNOestqgwTHSSs2oOep-78apyXQBvNi8ZLaFjvjWvcaUEBu0MC6Wbe-d6mB0FAebo2lUWinqYaZs5DAYzV0RP9yitUjnGJ0iI9xhZkT42OCQNUJJhkgWINNQLP2JFP6OpMg3JCVg70jqHT0lvKOnhHf0lPuOnnLf0VPuWx6_dxwUIvwk5WMkT0kLL1mh61l2yZVSzG3pYV_bqo-mj6uMKwKwdnnW8Jh5RTOJzMOA5c-eJDaZQw4mTMPH02PvS_ZAqNVjVTo2WyYLkwH_KU1mmmG5kjRhDqPXLwwVHvVOjCM60-fpXvTDfMGW1PVFVS1r4e4yVDk4ZdNbkUHvqPqQSeian4UD39fNKmachqdJ1NJbyk8rXT9mXTvPk3oE5meulKGgiruPJek-4I9hTT6G8ZLOyRSm2RRVbThERQad5OS28hdt4YW4vG0stgYYzsWsK4_7y6DZMjJSCqri1kyiZR5vD7pwIrNR7QwPHTcLTI5qT7eRlpHrdGiupYlqQDJ7zy_CND8fWWBoLRXxk1RVcXiBQwbTD4Xi7KL-FuO94t9xaqweXzH, Packing=Bulk, PartNumber=1729128, Pitch=5.08mm, RoHS=TRUE
Jttl: library part CMP-02766-001458-1, "CONN HEADER VERT 2POS 2.54MM", Color=Black, Flammability Rating="UL94 V-0", Max Current Rating=7.6A, Max Operating Temperature=125°C, Max Voltage Rating (AC)=550V, Min Operating Temperature=-55°C, Package Quantity=1, Connector Type=Header, Contact Finish - Mating=GOLD, Contact Material=Bronze, Contact Mating Length=0.23inch, Contact Plating=Gold, Contact Shape=Square, Contact Type="Male Pin", Depth=2.54mm, Fastening Type=Pull, Gender=Male, Housing Color=Black, Housing Material=Polyester, Insulation Color=Black, Insulation Material=PBT, Length=5.08mm, Mount="Through Hole", Number of Contacts=2, Number of Positions=2, Number of Rows=1, Orientation=Straight, Packaging=Bulk, Pitch=2.54mm, Radiation Hardening=No, REACH SVHC="No SVHC", RoHS Compliant=Yes, Series=TSW, Termination=Solder
L1: library part CMP-06042-011567-1, "Wire Wound Ferrite Inductor for Power Lines 10μH ±20% 0.1272Ω 1.60A 2020", Case Code (Imperial)=2220, Case Code (Metric)=5650, Case/Package=2020, Current Rating=1.6A, DC Resistance (DCR)=106mR, Inductance=10uH, Inductance Tolerance=20%, Max DC Current=2A, Max Operating Temperature=125°C, Min Operating Temperature=-40°C, Package Quantity=1, Resistor Type=Wirewound, Self Resonant Frequency=25MHz, Test Frequency=100kHz, Core Material=Ferrite, DC Current=1.6A, Depth=5.2mm, Height=2mm, Height - Seated (Max)=0.086inch, Lead Free="Lead Free", Length=5mm, Military Standard=Not, Mount="Surface Mount", Packaging="Tape and Reel", REACH SVHC="No SVHC", Shielding=Shielded, Termination=SMD/SMT, Tolerance=20%, Width=5mm
Picsp: library part CMP-1024-00098-1, "Modified .025\" SQ Post Header, Through-hole, Vertical, -55 to 125 degC, 2.54 mm Pitch, 6-Pin, Male, RoHS", Manufacturer=Samtec, Temperature Range="-55 to 125 degC", ComponentLink1Description="Manufacturer URL", ComponentLink1URL=http://www.samtec.com, ComponentLink2Description=Datasheet, ComponentLink2URL=http://www.samtec.com/documents/webfiles/pdf/MTSW.PDF, ComponentLink3Description="Package Specification", ComponentLink3URL=http://www.samtec.com/documents/webfiles/cpdf/MTSW-XXX-XX-X-X-XXXX-XX-XXX-MKT1.pdf, DatasheetVersion=F-214, Mounting Technology=Through-hole, Orientation=Vertical, PackageDescription="Assembly .025\" [.64] SQ Post Terminal Strip", PackageReference=MTSW-103-07-X-D-244, PackageVersion="BI, 2/1987", PartNumber=MTSW-103-07-F-D-244, Pitch="2.54 mm", RoHS=True
Qn: library part CMP-1058-00781-1, "Small Signal MOSFET, 60 V, 115 mA, N-Channel, 3-Pin SOT-23, Pb-Free, Tape and Reel", Manufacturer="On Semiconductor", Package Type=SOT-23-3, Channel Polarity="N Channel", ComponentLink1Description="Manufacturer URL", ComponentLink1URL=http://www.onsemi.com/, ComponentLink2Description=Datasheet, ComponentLink2URL=http://www.onsemi.com/pub_link/Collateral/2N7002L-D.PDF, ComponentLink3Description="Package Specification", ComponentLink3URL=http://www.onsemi.cn/pub_link/Collateral/318-08.PDF, Configuration=Single, DatasheetVersion="Rev. 7", ID Max (A)=0.115, Mounting Technology="Surface Mount", PackageDescription="3-Pin Small Outline Transistor, Body 2.92 x 1.3 mm, Pitch 0.95 mm", PackageReference=SOT-23-3-318-08, PackageVersion="Rev. AP, 11/2009", Packing="Tape and Reel", PartNumber=2N7002LT1G, RoHS=Pb-Free, V(BR)DSS Min (V)=60, VGS Max (V)=20, VGS(th) Max (V)=2.5
Qp: library part CMP-02550-000107-1, "MOSFET P-CH 60V 52A POWERPAKSO-8", Continuous Drain Current=-52A, Drain To Source Breakdown Voltage=-60V, Drain To Source Resistance=0.0155Ω, Gate To Source Voltage=20V, Input Capacitace At Vds="3448pF @ -30V", Manufacturer=Vishay, Max Forward Diode Voltage=-1.2V, Max Junction Temp=+175°C, Package=C15-1203-SINGLE, Power Dissipation=83W, Pulse Drain Current=-200A, Temperature="-55°C to +175°C", Temperature Range Low=-55°C, Typ Forward Diode Voltage=-0.8V, Automotive=Yes, Automotive Grade="Grade 0", Category=Trans, ComponentLink2Description=Datasheet, ComponentLink2URL=http://www.vishay.com/docs/66963/sqj459ep.pdf, Depletion Mode=False, Device Class L1="Discrete Semiconductors", Device Class L2=Transistors, Device Class L3=MOSFETs, Digikey Description="MOSFET P-CH 60V 52A POWERPAKSO-8", Drain To Source Voltage=-60V, Gate Charge At Vgs="73nC @ -10V", Height=1.267mm, Lead Free=Yes, Manufacturer Part Number=SQJ459EP-T1_GE3, Number Of Channels=1, Number Of P Channels=1, Octopart=https://octopart.com/sqj459ep-t1_ge3-vishay-73080141, RoHS=TRUE, Rthja Max=65°C/W, Standoff Height=0mm, Temperature Range High=+175°C, Threshold Vgs Max=-2.5V, Threshold Vgs Min=-1.5V, Transconductance=40S, Turn Off Delay Time=88ns, Turn On Delay Time=12ns
Rdiv1: library part CMP-2001-02713-2, "Automotive Metal Thin Film Chip Resistor, 0805, 1MΩ, 0.1%, 25ppm/°C, 0.125W, 150V", Case Code (Imperial)=0805, Case Code (Metric)=2012, Max Operating Temperature=155°C, Max Power Dissipation=125mW, Min Operating Temperature=-55°C, Package Quantity=5000, Power Rating=100mW, Resistance=1MR, Temperature Coefficient=25ppm/°C, Tolerance=0.1%, Voltage Rating=100V, Voltage Rating (DC)=150V, Case/Package=0805, Features="Automotive AEC-Q200", Height=0.4mm, Lead Free="Lead Free", Length=2mm, Number of Terminations=2, Packaging="Tape and Reel", RoHS Compliant=Yes, Series=RG, Termination=SMD/SMT, Width=1.25mm
Rdiv2: library part CMP-2001-02887-2, "Automotive Metal Thin Film Chip Resistor, 0805, 280kΩ, 0.1%, 25ppm/°C, 0.125W, 150V", Case Code (Imperial)=0805, Case Code (Metric)=2012, Max Operating Temperature=155°C, Max Power Dissipation=125mW, Min Operating Temperature=-55°C, Package Quantity=1, Resistance=280kR, Resistor Type="Thin Film", Temperature Coefficient=25ppm/°C, Tolerance=0.1%, Voltage Rating=150V, Case/Package=0805, Features="Automotive AEC-Q200", Height=0.02inch, Lead Free="Lead Free", Length=0.079inch, Number of Terminations=2, Packaging="Tape and Reel", Power Rating=125mW, RoHS Compliant=Yes, Series=RG, Termination=SMD/SMT, Voltage Rating (DC)=150V, Weight=0.000194oz, Width=0.049inch
Rled_glv Rled_lsr Rpwr: library part CMP-2001-03607-2, "RES Thick Film, 1.2kΩ, 1%, 0.125W, 100ppm/°C, 0805", Case Code (Imperial)=0805, Case Code (Metric)=2012, Max Operating Temperature=155°C, Max Power Dissipation=125mW, Min Operating Temperature=-55°C, Package Quantity=10, Resistance=1.2kR, Temperature Coefficient=100ppm/°C, Tolerance=1%, Voltage Rating=150V, Case/Package=0805, Composition="Thick Film", Contact Plating=Tin, Depth=1.25mm, Features="Automotive AEC-Q200", Height=0.45mm, Lead Free="Lead Free", Length=2mm, Military Standard=Not, Number of Terminations=2, Packaging="Tape and Reel", Power Rating=125mW, Radiation Hardening=No, Termination=SMD/SMT, Voltage Rating (DC)=150V, Weight=0.000194oz, Width=0.049inch
Rnet_ain: library part CMP-2001-00644-1, Manufacturer=Panasonic, Part Number=ERA6AEB472V
Rnet_bias: library part CMP-2001-00840-1, Manufacturer=Panasonic, Part Number=ERA6AEB4993V
Rnet_gnd: library part CMP-2001-00586-1, Manufacturer=Panasonic, Part Number=ERA6AEB113V
Rnfet_pd Rpfet_vd1 Rpfet_vd2 Rreset Rthm1 Rthm2: library part CMP-2001-00582-2, "Metal Film Chip Resistor, High Reliability Type, 0.125 W, +/- 0.1%, -55 to 155 degC, 0805 (2012 Metric), RoHS, Tape and Reel", Case Code - in=0805, Case Code - mm=2012, Manufacturer=Panasonic, Operating Temperature Range=-55Cto+155C, Package / Case=0805(2012metric), Package Description="2-Pin Surface Mount Device, Body 2 x 1.25 mm", Power Rating=125mW(1/8W), Resistance=10kOhms, Temperature Coefficient=25PPM/C, Tolerance=0.1%, Voltage Rating=100V, Brand=Panasonic, Datasheet URL=https://industrial.panasonic.com/cdbs/www-data/pdf/RDM0000/AOA0000C307.pdf, Datasheet Version=02/2016, Factory Pack Quantity=5000, Height=0.5mm, Length=2mm, Manufacturer URL=http://www.panasonic.com/, Mounting Technology=SurfaceMount, Package Reference=0805, Packaging=Reel, Product=ThinFilmResistorsSMD, Product Category=ThinFilmResistors-SMD, RoHS=Details, Series=ERA-6A, Termination Style=SMD/SMT, Type=MetalFilmChipResistors, Width=1.25mm
Rnfet_sf: library part CMP-2001-00628-1, Manufacturer=Panasonic, Part Number=ERA6AEB331V
Rpot: library part CMP-2000-05582-2, "TRIMMER 2K OHM 0.5W PC PIN TOP", Color=Blue, Max Operating Temperature=125°C, Max Power Dissipation=500mW, Min Operating Temperature=-55°C, Package Quantity=50, Resistance=2kR, Resistance Tolerance=10%, Resistor Type=Cermet, Temperature Coefficient=100ppm/°C, Contact Plating=Tin, Depth=4.83mm, Height=0.395inch, Lead Free="Lead Free", Length=9.53mm, Military Standard=Not, Mount=Panel, Number of Turns=25, Packaging=Rail/Tube, Power Rating=500mW, Radiation Hardening=No, REACH SVHC="No SVHC", RoHS Compliant=Yes, Series=3296, Taper=Linear, Technology=CERMET, Termination=Pin, Tolerance=10%, Weight=0.03oz, Width=9.53mm
Rset1: library part CMP-2001-00599-2, "RES 150K OHM 0.1% 1/8W 0805", Case Code (Imperial)=0805, Case Code (Metric)=2012, Max Operating Temperature=155°C, Max Power Dissipation=125mW, Min Operating Temperature=-55°C, Package Quantity=5000, Resistance=150kR, Resistance Tolerance=0.1%, Resistor Type="Thin Film", Temperature Coefficient=25ppm/°C, Voltage Rating=100V, Case/Package=0805, Construction=Rectangular, Contact Plating=Tin, Depth=1.25mm, Height=0.5mm, Lead Free="Lead Free", Length=2mm, Military Standard=Not, Mount="Surface Mount", Number of Pins=2, Number of Terminations=2, Packaging="Tape and Reel", Power Rating=125mW, Radiation Hardening=No, REACH SVHC="No SVHC", RoHS Compliant=Yes, Series=ERA-6A, Technology="METAL FILM", Termination=SMD/SMT, Tolerance=0.1%, Voltage Rating (DC)=100V, Width=1.25mm
Rset2: library part CMP-2001-00645-2, Case Code (Imperial)=0805, Case Code (Metric)=2012, Max Operating Temperature=155°C, Max Power Dissipation=125mW, Min Operating Temperature=-55°C, Resistance=47kΩ, Temperature Coefficient=25ppm/°C, Tolerance=0.1%, Voltage Rating=100V, Case/Package=0805, Composition="Metal Film, Thin Film", Contact Plating=Tin, Depth=1.25mm, Features="Automotive AEC-Q200", Height=500µm, Lead Free="Lead Free", Length=2mm, Lifecycle Status=Production, Military Standard=Not, Mount="Surface Mount", NexarPartId=1264112, Number of Pins=2, Number of Terminations=2, Packaging="Cut Tape", Power Rating=125mW, Radiation Hardening=No, REACH SVHC="No SVHC", RoHS=Compliant, Schedule B="8533210045, 8533210045", Termination=SMD/SMT, Voltage Rating (DC)=100V, Weight=5.499807mg, Width=1.25mm
U1: "Automotive Qualified SIMPLE SWITCHERÂ® 40V (65V transient), 0.6A Buck Regulator with 28Î¼A IQ", Package="SOT-23-THN-6 Texas Instruments", Check_prices=https://www.snapeda.com/parts/LMR16006YQ5DDCRQ1/Texas+Instruments/view-part/?ref=eda, MF="Texas Instruments", MP=LMR16006YQ5DDCRQ1, SnapEDA_Link=https://www.snapeda.com/parts/LMR16006YQ5DDCRQ1/Texas+Instruments/view-part/?ref=snap
U2: library part CMP-0095-00269-2, "8-bit AVR Microcontroller, 32KB Flash, 1KB EEPROM, 2KB SRAM, 32-pin TQFP, Industrial Grade (-40°C to 85°C)", Code_JEDEC=MS-026-ABA, ComponentLink1Description="Manufacturer URL", ComponentLink1URL=http://www.atmel.com/, ComponentLink2Description="ATmega48A/48PA/88A/88PA/168A/168PA/328/328P Datasheet", ComponentLink2URL=http://www.atmel.com/dyn/resources/prod_documents/doc8271.pdf, ComponentLink3Description="ATmega48A/48PA/88A/88PA/168A/168PA/328/328P Summary", ComponentLink3URL=http://www.atmel.com/dyn/resources/prod_documents/8271S.pdf, DatasheetVersion="revD, May-2011", PackageDescription="32-Lead, 7x7x1.0 mm Body, 0.8mm Lead Pitch, Thin Profile Plastic Quad Flat Package (TQFP)", PackageReference=32A, PackageVersion="revC, Oct-2010", RevisionNote="DatasheetVersion & PackageVersion updated. URLs added."
U3: library part CMP-0859-00053-3, "Single 2-Input Positive-AND Gate, DBV0005A, LARGE T&R", F @ Nom Voltage(Max)(Mhz)=150, Generic Part Number=SN74LVC1G08, ICC @ Nom Voltage(Max)(mA)=0.01, Manufacturer="Texas Instruments", Operating Temperature Range(C)="-40 to 125,-40 to 85", Rating=Catalog, tpd @ Nom Voltage(Max)(ns)=4.5,6,4,5, Voltage(Nom)(V)=1.8,2.5,3.3,5, 3-State Output=No, Bits(#)=1, DatasheetVersion=SCES217Y, Gate Type=AND, Input Type=CMOS/TTL, Logic=True, Output Drive (IOL/IOH)(Max)(mA)=32/-32, Output Type=CMOS, PackageReference=DBV0005A, Schmitt Trigger=No, Sub-Family="AND Gate", Technology Family=LVC, VCC(Max)(V)=5.5, VCC(Min)(V)=1.65
U4: library part CMP-09075-000003-1, "IC OSC SILICON PROG TSOT23-6", Case/Package=SOT-23-6, Frequency=3.81Hz, Max Operating Temperature=125°C, Min Operating Temperature=-55°C, Operating Supply Current=365uA, Package Quantity=500, Mount="Surface Mount", Number of Pins=6, Packaging="Tape and Reel", RoHS Compliant=Yes, Series=TimerBlox®
Yxtal: library part CMP-27762-000003-1, "CRYSTAL 16.0000MHZ 18PF SMD", Frequency=16MHz, Load Capacitance=18pF, Manufacturer=Abracon, Package=ABLS, Temperature="-40°C to +125°C", Temperature Range High=+125°C, Temperature Range Low=-40°C, Tolerance=30ppm, Automotive=No, Category=Crys, ComponentLink2Description=Datasheet, ComponentLink2URL=https://abracon.com/Resonators/abls.pdf, Device Class L1="Passive Components", Device Class L2="Crystals / Oscillators", Device Class L3=Crystals, Digikey Description="CRYSTAL 16.0000MHZ 18PF SMD", Esr=40Ω, Height=4.3mm, Lead Free=Yes, Manufacturer Part Number=ABLS-16.000MHZ-K4T, Mouser Description="Crystal 16MHz ±30ppm (Tol) ±50ppm (Stability) 18pF FUND 40Ohm 2-Pin HC-49/US SMD T/R", Octopart=https://octopart.com/abls-16.000mhz-k4t-abracon-18618626, RoHS=TRUE, Series=ABLS, Stability=50ppm, Standoff Height=0mm

## Free pads (board coordinates)
  round 0 hole 86.61 unplated: 4(1929.13,3622.05) 5(3070.87,3622.05) 6(1365,2865)

## Via types
v1: diameter 24, hole 12, Top Layer to Bottom Layer, tented both sides, 54 vias

## Nets (pads, with @x,y where several pads share a name; then routed paths per layer and width w, separated by ;. In a path a pad name is that pad's centre, name@x,y a point inside that pad or via, vN(x,y) a via of type N, cw(c..) or ccw(c..) an arc to the next point about the centre after c; other vN are vias at no path point)
GND: AIN.2 Cand.2 Caref.2 Cavcc.2 Cin.2 Cltc.2 Cout.2 Cthm1.2 Cthm2.2 Cvcc1.2 Cvcc2.2 Cxtal1.1 Cxtal2.1 D1.2 Dpfet_sch.2 DSglv.2 DSlsr.2 DSpwr.2 Jglv.1 Jvin.2 Picsp.6 Plsr.2 Qn.2 Rdiv2.2 Rnet_gnd.1 Rnfet_pd.2 Rset2.2 Rthm1.2 Rthm2.2 U1.2 U2.3 U2.5 U2.21 U3.3 U4.2 | length 1303.2
  Top Layer w12: v1(1540,2775) 1540,2772.3 1549.87,2762.43 U1.2 ; D1.2 1674.08,2341.26 1682.72,2332.62 1721.04,2332.62 DSpwr.2 ; v1(2162.35,2715) 2162.35,2726.81 2170.13,2734.59 2181.94,2734.59 2195.14,2747.78 cw(c2216.76,2726.22) 2216.76,2756.76 2237.7,2777.7 2237.7,2813.84 v1(2239.92,2816.06) ; v1(2221.41,2595) v1(2327.86,2595) ; v1(2282.6,2715) 2282.6,2726.81 2290.38,2734.59 2295.88,2734.59 2302.91,2741.62 v1(2302.91,2816.06)
  Top Layer w100: Jglv.1 1359.35,3551.13 1380.15,3571.94 1587.12,3571.94 v1(1593.22,3578.04)
  Bottom Layer w12: v1(1540,2775) 1540,2620 1623.85,2536.15 1638.85,2536.15 v1(1725,2450)
  other v1: 2786.34,2405 2901.93,2404.67 1710,2425 1695,2450 2922.6,2564.29 2735,2687.6 2553.08,2835 2767.81,2920.08 1911.34,2970 2660.36,2995 2738.29,3023.39 2271.42,3150.71 1838.93,3215.44 1910,3229.05 2103.16,3249.3 2298.21,3249.3 2360.34,3310.32 2435.34,3310.32 2111.28,3322.3 2290.34,3322.3 1630,3545 1630,3610
NetAIN_1: AIN.1 Rpot.3 | length 241.3
  Top Layer w12: Rpot.3 3322.44,2824.13 AIN.1
NetCaref_1: Caref.1 U2.20 | length 115.5
  Top Layer w12: U2.20 2305.14,3152.93 2305.14,3192.13 2348.53,3235.52 Caref.1
NetCboot_2: Cboot.2 U1.1 | length 153.9
  Top Layer w22: U1.1 1587.27,2797.11 1608.23,2818.07 1608.23,2859.2 Cboot.2
NetCthm1_1: Cthm1.1 Pthm1.1 Rthm1.1 U2.23 | length 1476.1
  Top Layer w12: U2.23 2210.65,3152.93 2210.65,3192.95 2223.41,3205.71 Cthm1.1 2223.41,3261.11 2231.28,3268.99 Rthm1.1 2244.97,3335.99 2244.97,3343.85 2367.63,3466.51 2994.28,3466.51 Pthm1.1
NetCthm2_1: Cthm2.1 Pthm2.1 Rthm2.1 U2.24 | length 1423.5
  Top Layer w12: U2.24 2177.45,3151.23 2177.45,3248.78 Cthm2.1 2177.97,3314.68 Rthm2.1 2184.02,3335.99 2184.02,3341.96 2337.06,3495 3280,3495 Pthm2.1
NetCxtal1_2: Cxtal1.2 U2.7 Yxtal.1 | length 611.4
  Top Layer w12: Yxtal.1 2121.11,2442.48 2156.45,2477.82 Cxtal1.2 2177.02,2615.57 2177.02,2637.02 2196.48,2656.48 2360.88,2656.48 2387.18,2682.78 2387.18,2747.22 2377.81,2756.59 2373.41,2756.59 2365.9,2764.1 U2.7
NetCxtal2_2: Cxtal2.2 U2.8 Yxtal.2 | length 446.9
  Top Layer w12: U2.8 2399.62,2813.84 2399.62,2765.89 2409.18,2756.33 2409.18,2611.36 Cxtal2.2 2392.82,2477.82 2428.16,2442.48 Yxtal.2
NetDpfet_sch_1: Dpfet_sch.1 Jglv.2 Qp.5 | length 584.6
  Top Layer w100: Qp.5@1310,3110 Qp.5 1298.62,3112.63 1298.62,3327.57 Jglv.2 1587.77,3351.13 Dpfet_sch.1
NetDpfet_zn_2: Dpfet_zn.2 Qp.4 Rpfet_vd1.1 Rpfet_vd2.1 | length 260.3
  Top Layer w12: Qp.4 1456.35,3178.56 1562.37,3178.56 Dpfet_zn.2 1638.99,3170 Rpfet_vd2.1 1648.86,3164.11 Rpfet_vd1.1
NetDSglv_1: DSglv.1 Rled_glv.2 | length 110.1
  Top Layer w12: Rled_glv.2 1758.22,3041.06 1811.04,2988.24 1811.04,2987.62 DSglv.1
NetDSlsr_1: DSlsr.1 Rled_lsr.2 | length 76.2
  Top Layer w12: DSlsr.1 2703.66,2477.02 Rled_lsr.2
NetDSpwr_1: DSpwr.1 Rpwr.2 | length 73.7
  Top Layer w12: DSpwr.1 Rpwr.2
NetJttl_1: Jttl.1 U2.30 | length 233.8
  Top Layer w12: Jttl.1 2014.91,2812.5 2014.91,2884.91 2065.62,2935.62 2119.32,2935.62 U2.30
NetJttl_2: Jttl.2 U2.31 | length 300.2
  Top Layer w12: Jttl.2 2044.66,2742.26 2044.66,2879.66 2067.42,2902.42 2117.62,2902.42 U2.31
NetPicsp_1: Picsp.1 U2.16 | length 594.2
  Top Layer w12: U2.16 2534.4,3093.62 2745.43,3304.65 2745.43,3336.21 2776.6,3367.38 2808.15,3367.38 2836.27,3395.49 2870.49,3395.49 Picsp.1
NetPicsp_3: Picsp.3 U2.17 | length 509.1
  Top Layer w12: U2.17 2457.61,3150.71 2673.41,3366.51 2741.51,3366.51 Picsp.3
NetPicsp_4: Picsp.4 U2.15 | length 447.3
  Top Layer w12: U2.15 2537.13,3062.13 Picsp.4
NetPlsr_1: Plsr.1 U3.4 | length 318.1
  Top Layer w12: U3.4 3298.1,2404.67 Plsr.1
NetQn_1: Qn.1 Rnfet_pd.1 Rnfet_sf.2 | length 143.3
  Top Layer w12: Qn.1 1875.72,3140.63 1905.08,3170 Rnfet_pd.1 Rnfet_sf.2
NetQn_3: Qn.3 Rpfet_vd2.2 | length 62.7
  Top Layer w12: Rpfet_vd2.2 1706.09,3178.04 Qn.3
NetRdiv1_2: Rdiv1.2 Rdiv2.1 U4.4 | length 169.3
  Top Layer w12: Rdiv1.2 Rdiv2.1 2726.39,2835 2730.41,2830.98 U4.4
NetRled_glv_1: Rled_glv.1 Rnfet_sf.1 U2.25 | length 302.5
  Top Layer w12: Rled_glv.1 Rnfet_sf.1 1923.69,3064.59 1959.59,3064.59 1988.62,3093.62 U2.25
NetRled_lsr_1: Rled_lsr.1 U2.11 U3.2 | length 786.4
  Top Layer w12: U2.11 2456.71,2933.92 2491.12,2933.92 2508.87,2916.17 2508.87,2706.54 2610.89,2604.53 2668.67,2604.53 2783.39,2489.81 Rled_lsr.1 2783.39,2470.13 2796.09,2457.43 2832.52,2457.43 2847.87,2442.07 U3.2
NetRnet_ain_1: Rnet_ain.1 Rpot.1 Rpot.2 | length 265.9
  Top Layer w12: Rnet_ain.1 2922.55,2924.13 Rpot.2 Rpot.1
NetRnet_ain_2: Rnet_ain.2 Rnet_bias.1 Rnet_gnd.2 U4.1 | length 378.6
  Top Layer w12: U4.1 2833.57,2920.08 2888.31,2974.82 2898.44,2974.82 Rnet_ain.2 ; Rnet_gnd.2 2890.04,3023.39 2917.05,2996.38 Rnet_ain.2 ; Rnet_bias.1 Rnet_ain.2
NetRset1_1: Rset1.1 U4.3 | length 70.1
  Top Layer w12: Rset1.1 2660.45,2920.08 U4.3
NetRset1_2: Rset1.2 Rset2.1 | length 75
  Top Layer w12: Rset1.2 Rset2.1
OUT: U3.1 U4.6 | length 395.2
  Top Layer w12: U4.6 2805.22,2565.36 2891.1,2479.48 U3.1
RST: Picsp.5 Rreset.1 U2.29 | length 1391.3
  Top Layer w12: v1(1941.94,2895) 1944.23,2897.3 1944.23,2902.22 2010.6,2968.58 Rreset.1 2016.47,2967.64 U2.29
  Bottom Layer w12: v1(1941.94,2895) 1965,2918.06 1965,3275 2110,3420 Picsp.5
SW: Cboot.1 D1.1 L1.1 U1.6
VDD: Cand.1 Cavcc.1 Cltc.1 Cout.1 Cvcc1.1 Cvcc2.1 L1.2 Picsp.2 Pthm1.2 Pthm2.2 Rdiv1.1 Rnet_bias.2 Rpwr.1 Rreset.2 U1.3 U2.4 U2.6 U2.18 U3.5 U4.5 | length 1263.8
  Top Layer w12: U1.3 1512.47,2867.47 1560,2915 1710,2915 cw(c1710,2697.72) 1863.64,2851.36 1863.69,2851.31 1910,2805 1910,2525 1895,2510 Cout.1 ; v1(1860,2425) 1862.3,2422.7 1862.3,2414.63 1885.16,2391.77 Rpwr.1 ; v1(2237.16,2715) 2244.93,2722.78 2244.93,2744.93 2271.37,2771.37 2271.37,2816.02 v1(2271.42,2816.06) ; v1(2334.41,2816.06) 2334.41,2741.62 2341.44,2734.59 2349.62,2734.59 2357.4,2726.81 v1(2357.4,2715)
  other v1: 1815,2425 1838.4,2457.59 3018.07,2479.48 2997.4,2564.29 2553.08,2745 2735,2762.4 2767.81,2828.31 2015.52,3027.64 2365.9,3150.71 2920,3177.4 2435.34,3235.52
VIN: Cin.1 Dpfet_zn.1 Jvin.1 Qp.1 Qp.2 Qp.3 Rpfet_vd1.2 U1.4 U1.5
  other v1: 1493.56,2525.23 1570.93,3041.26 1460,3045 1648.86,3047.8 1460,3085 1460,3120
pads on no net: U2.1 U2.2 U2.9 U2.10 U2.12 U2.13 U2.14 U2.19 U2.22 U2.26 U2.27 U2.28 U2.32

## Polygon pours and split planes (outlines as drawn)
GND on Top Layer "GND_L01_P023" (solid, remove dead copper, pour order 23): 1740,2545 1740,2395 1640,2295 1575,2295 1460,2400 1265,2405 1265,2475 1485,2445 1525,2445 1575,2390 1640,2390 1680,2430 1680,2545
VIN on Top Layer "VIN_L01_P025" (solid, remove dead copper, pour order 25): 1295,2675 1330,2675 1455,2550 1460,2555 1501.25,2610 1560,2610 1545,2580 1525,2545 1525,2500 1405,2500 1300,2605 1295,2605
SW on Top Layer "SW_L01_P021" (solid, remove dead copper, pour order 21): 1705,2895 1705,2625 1640,2604.23 1640,2450 1575,2450 1575,2660 1630,2660 1630,2780 1645,2795 1645,2895
VDD on Top Layer "VDD_L01_P022" (solid, remove dead copper, pour order 22): 1775,2780 1885,2780 1885,2400 1790,2400 1790,2605 1775,2620
VIN on Top Layer "VIN_L01_P015" (solid, remove dead copper, pour order 15): 1625,3025 1620,3025 1440,3025 1440,3140 1470,3140 1535,3070 1640,3070 1640,3025
VDD on Power "VDD_L03_P019" (solid, remove dead copper, pour order 19): 3440,2325 1165,2325 1165,3655 3440,3655
VIN on Power "VIN_L03_P018" (solid, remove dead copper, pour order 18): 1455,3160 1455,3155 1540,3070 1675,3070 1675,3005 1470,2800 1470,2745 1505,2710 1555,2710 1555,2485 1550,2480 1420,2480 1335,2565 1180,2565 1180,2845
GND on Ground "GND_L02_P017" (solid, remove dead copper, pour order 17): 3625,2325 1165,2325 1165,3655 3625,3655

## Silkscreen, mask and mechanical layers (free items; w line width, h text height)
Top Overlay:
  text "GND" at 1129.92,3677.17 h39.37
  text "RST" at 2582.52,3492.87 h39.37
  text "SCK" at 2742.52,3492.87 h39.37
  text "MISO" at 2886.12,3492.87 h39.37
  text "TH2" at 3103.71,3492.87 h39.37
  text "GND" at 2582.52,3222.87 h39.37
  text "MOSI" at 2729.4,3222.87 h39.37
  text "VDD" at 2902.52,3222.87 h39.37
  text "TH1" at 3116.83,3217.87 h39.37
  text "GLV" at 1129.92,3185.04 h39.37
  text "Galvo" at 1611.45,2952.87 h39.37
  text "RX" at 1957.2,2877.87 h39.37
  text "24V" at 1129.92,2763.78 h39.37
  text "AIN" at 3110.27,2672.87 h39.37
  text "TX" at 1957.2,2567.87 h39.37
  text "GND" at 3103.71,2559.06 h39.37
  text "PWM" at 3103.71,2354.33 h39.37
  text "Laser" at 2656.45,2307.87 h39.37
  text "GND" at 1129.92,2271.65 h39.37